# Altium PCB PCB1.PcbDoc (part 7 of 8)
Units mil, origin at the board's own origin, x right, y up, seen from the top; angles counter-clockwise.
Board outline 3820 x 2600 mil, 2 copper layers (Top Layer, Bottom Layer); 88 components, 130 nets, 566 pads, 113 vias.
Unrouted connection lines stored in the file: 16.
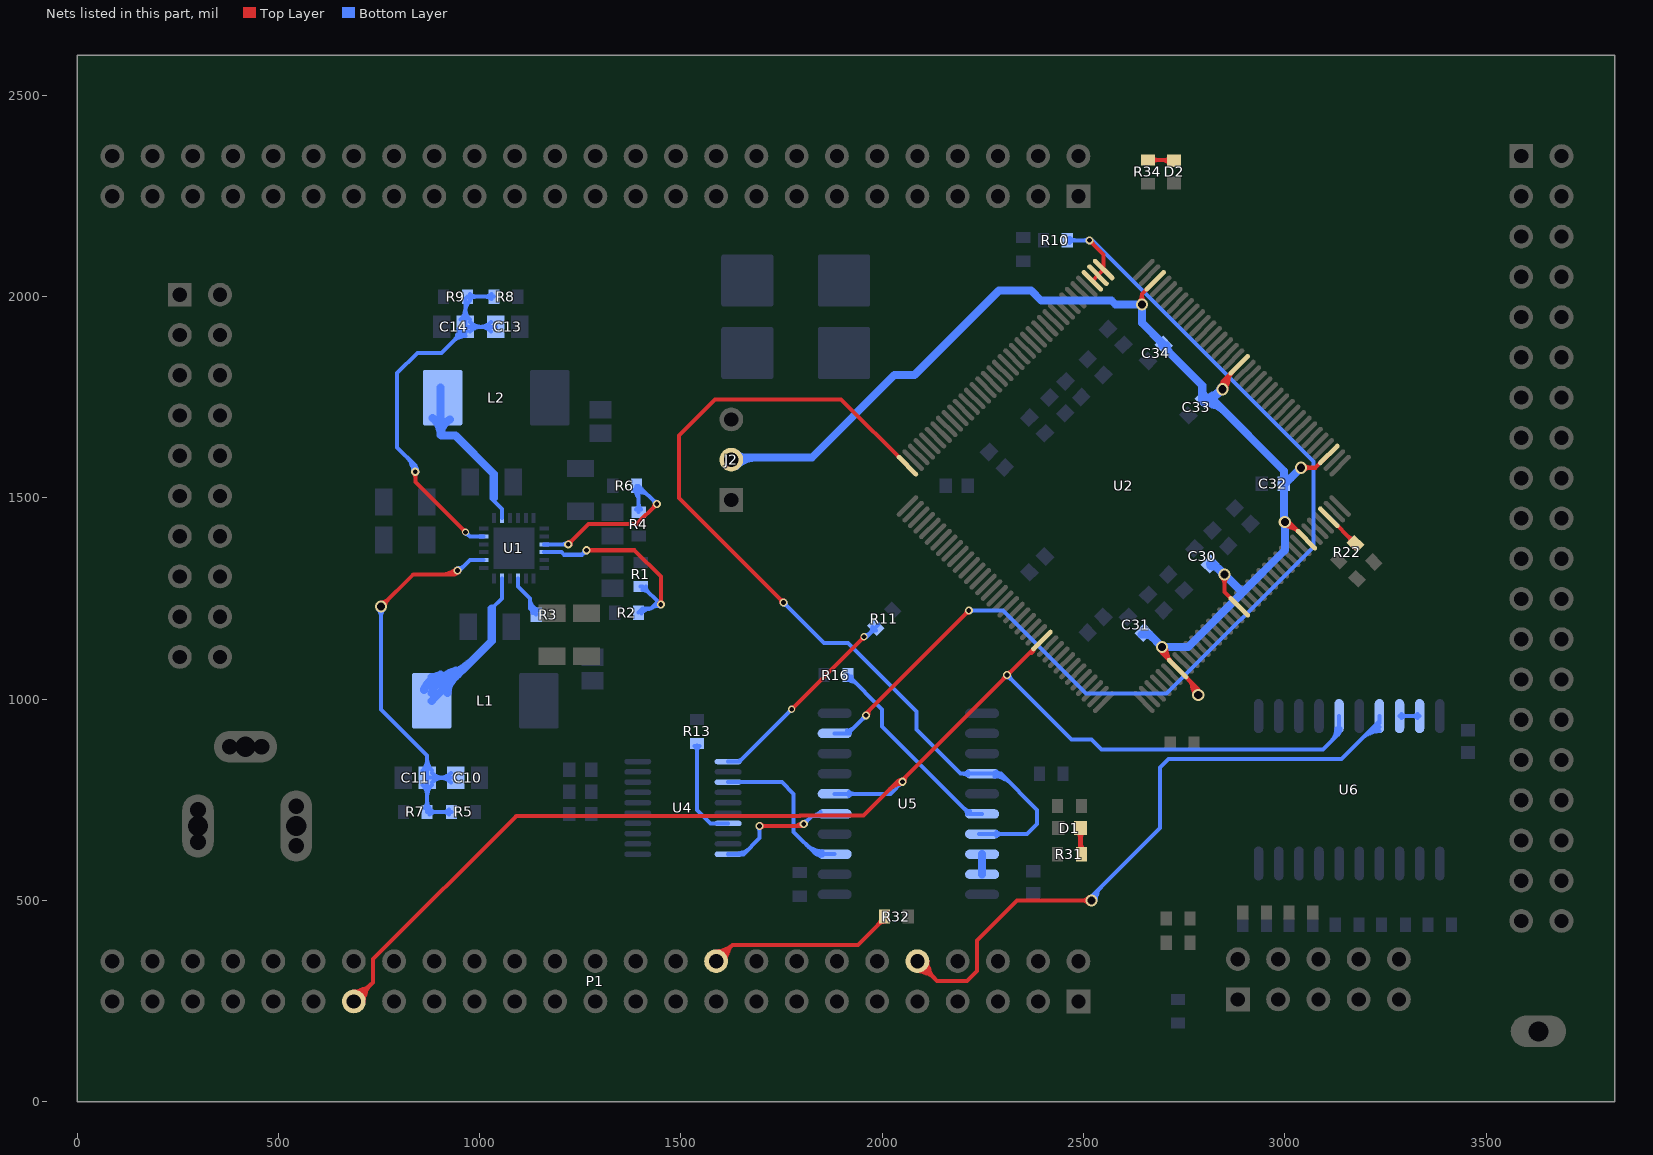
[diagram p7: the nets of this part, all layers, seen from the top]

## Via types
v1: diameter 30, hole 20, Top Layer to Bottom Layer, 74 vias
v2: diameter 20, hole 12, Top Layer to Bottom Layer, 36 vias
v3: diameter 17.72, hole 11.81, Top Layer to Bottom Layer, 3 vias

## Nets (pads, with @x,y where several pads share a name; then routed paths per layer and width w, separated by ;. In a path a pad name is that pad's centre, name@x,y a point inside that pad or via, vN(x,y) a via of type N, cw(c..) or ccw(c..) an arc to the next point about the centre after c; other vN are vias at no path point) (continued)
MSCK: P1.37 U2.97 U5.6 U6.15 | length 4315.3
  Top Layer w10: P1.37@682.04,250.31 cw(c719.7,242.6) 709.75,279.73 ; P1.37@687.4,249.21 735,296.81 735,354.13 1090.87,710 1795.3,710 1796.3,711 1953.37,711 2038.37,796 ; P1.37@688.5,243.85 ccw(c680.79,281.51) 717.92,271.56 ; 2028.33,784.19 ccw(c2020.94,811.78) v2@2045.67,797.5 ; 2370.67,1114.5 ccw(c2360.22,1124.95) U2.97@2374.99,1124.95 ; 2372.91,1116.75 ccw(c2367.11,1122.55) U2.97@2375.02,1124.71 ; 2372.91,1117.41 cw(c2381.25,1117.41) U2.97@2376.42,1124.21 ; 2372.91,1118.03 ccw(c2367.55,1123.39) U2.97@2375.01,1124.78 ; U2.97@2396.78,1145.82 2046.95,796 2038.37,796 ; 712.2,274.01 cw(c687.4,298.81) 687.4,263.74 ccw(c687.4,298.81) 712.2,274.01 ; 712.2,274.01 ccw(c737,249.21) 701.93,249.21 cw(c737,249.21) 712.2,274.01 ; 729.27,291.08 cw(c687.4,332.95) 687.4,273.74 ccw(c687.4,332.95) 729.27,291.08 ; 729.27,291.08 ccw(c771.14,249.21) 711.93,249.21 cw(c771.14,249.21) 729.27,291.08 ; 2038.37,796 cw(c2038.37,786.73) 2045.92,792.1 ccw(c2038.37,786.73) 2038.37,796 ; 2019.91,777.54 cw(c2050,747.44) 2050,790 ccw(c2050,747.44) 2019.91,777.54 ; 2036.98,794.61 cw(c2050,781.59) 2050,800 ccw(c2050,781.59) 2036.98,794.61 ; v2@2055,795 cw(c2076.84,795) 2061.4,810.45 ccw(c2076.84,795) v2@2055,795 ; 2300.79,1049.84 ccw(c2290.63,1060) 2305,1060 cw(c2290.63,1060) 2300.79,1049.84 ; 2303.09,1052.14 cw(c2310,1045.23) 2310,1055 ccw(c2310,1045.23) 2303.09,1052.14 ; v2@2310,1065 ccw(c2310,1079.37) 2320.16,1069.21 cw(c2310,1079.37) v2@2310,1065 ; v2@2315,1060 cw(c2324.77,1060) 2317.86,1066.91 ccw(c2324.77,1060) v2@2315,1060
  Bottom Layer w10: U5.6@1881.93,765 2020,765 v2(2050,795) ; v2@2305,1055 cw(c2305,1030.86) 2322.07,1047.93 cw(c2339.14,1065) v2@2315,1065 ; v2@2315,1055 2470,900 2520,900 2545,875 3095,875 3135,915 ; U6.15@3135,958.07 3135,915 ; U5.6@1917.26,760.18 cw(c1928.89,748.56) 1928.89,765 ; U5.6@1917.26,760.18 cw(c1928.89,748.56) 1928.89,765 ; U5.6@1917.26,760.18 cw(c1928.89,748.56) 1928.89,765 ; U5.6@1917.26,769.82 ccw(c1928.89,781.44) 1928.89,765 ; U5.6@1917.26,769.82 ccw(c1928.89,781.44) 1928.89,765 ; U5.6@1917.26,769.82 ccw(c1928.89,781.44) 1928.89,765 ; 2041.46,786.46 cw(c2050,777.93) 2050,790 ccw(c2050,777.93) 2041.46,786.46 ; 2041.46,786.46 ccw(c2032.93,795) 2045,795 cw(c2032.93,795) 2041.46,786.46 ; 2318.54,1051.46 cw(c2327.07,1060) 2315,1060 ccw(c2327.07,1060) 2318.54,1051.46 ; 2318.54,1051.46 ccw(c2310,1042.93) 2310,1055 cw(c2310,1042.93) 2318.54,1051.46 ; 3114.49,894.49 ccw(c3081.43,927.56) U6.15@3128.19,927.56 ; 3114.49,894.49 ccw(c3081.43,927.56) U6.15@3128.19,927.56 ; 3114.49,894.49 ccw(c3081.43,927.56) U6.15@3128.19,927.56 ; U6.15@3131.29,921.85 cw(c3126.83,915) 3135,915 ; U6.15@3131.29,921.85 cw(c3126.83,915) 3135,915 ; U6.15@3131.29,921.85 cw(c3126.83,915) 3135,915 ; 3131.56,911.56 ccw(c3115.57,927.56) U6.15@3138.19,927.56 ; 3131.56,911.56 ccw(c3115.57,927.56) U6.15@3138.19,927.56 ; 3131.56,911.56 ccw(c3115.57,927.56) U6.15@3138.19,927.56 ; 3135,915 cw(c3143.17,915) U6.15@3138.71,921.85 ; 3135,915 cw(c3143.17,915) U6.15@3138.71,921.85 ; 3135,915 cw(c3143.17,915) U6.15@3138.71,921.85
  other v2: 2310,1060
MTMS: P1.10 U6.17 | length 2723.3
  Top Layer w10: P1.10@2082.04,348.11 ccw(c2119.7,355.83) 2109.75,318.7 ; P1.10@2087.4,349.21 2136.61,300 2210,300 2235,325 2235,400.75 2334.25,500 v1(2520,500) ; P1.10@2088.5,354.57 cw(c2080.79,316.92) 2117.92,326.86 ; 2112.2,324.41 cw(c2137,349.21) 2101.93,349.21 ccw(c2137,349.21) 2112.2,324.41 ; 2112.2,324.41 ccw(c2087.4,299.61) 2087.4,334.68 cw(c2087.4,299.61) 2112.2,324.41 ; 2129.27,307.34 cw(c2171.14,349.21) 2111.93,349.21 ccw(c2171.14,349.21) 2129.27,307.34 ; 2129.27,307.34 ccw(c2087.4,265.47) 2087.4,324.68 cw(c2087.4,265.47) 2129.27,307.34 ; 2495.86,500 cw(c2495.86,475.86) v1@2512.93,492.93 ; 2495.86,500 ccw(c2495.86,524.14) v1@2512.93,507.07 ; 2495.86,500 cw(c2495.86,475.86) v1@2512.93,492.93 ; 2495.86,500 ccw(c2495.86,524.14) v1@2512.93,507.07 ; 2495.86,500 ccw(c2495.86,524.14) v1@2512.93,507.07 ; 2495.86,500 cw(c2495.86,475.86) v1@2512.93,492.93
  Bottom Layer w10: 3214.86,916.72 cw(c3227.44,904.14) U6.17@3232.91,921.08 ; U6.17@3229.19,931.12 cw(c3222.59,935.17) 3222.59,927.42 ; U6.17@3229.32,923.8 ccw(c3222.59,919.36) 3222.59,927.42 ; U6.17@3235,958.07 3235,945.3 3140.7,851 2711,851 2690,830 2690,680 2520,510 v1(2520,500) ; v1(2520,500) cw(c2544.14,500) 2527.07,517.07 ; v1(2520,500) ccw(c2506.6,526.13) 2534.97,518.53 ; v1(2520,500) ccw(c2506.6,526.13) 2534.97,518.53 ; v1(2520,500) cw(c2544.14,500) 2527.07,517.07 ; v1(2520,500) ccw(c2506.6,526.13) 2534.97,518.53 ; v1(2520,500) cw(c2544.14,500) 2527.07,517.07 ; v1@2530,500 cw(c2578.28,500) 2544.14,534.14 ; v1@2530,500 cw(c2578.28,500) 2544.14,534.14 ; v1@2530,500 cw(c2578.28,500) 2544.14,534.14 ; 3193.09,903.39 cw(c3235,861.48) U6.17@3235,920.75 ; 3193.09,903.39 cw(c3235,861.48) U6.17@3235,920.75 ; 3193.09,903.39 cw(c3235,861.48) U6.17@3235,920.75 ; 3205.48,912.84 ccw(c3195.41,950.42) U6.17@3229.1,930.96 ; 3205.48,912.84 ccw(c3195.41,950.42) U6.17@3229.1,930.96 ; 3205.48,912.84 ccw(c3195.41,950.42) U6.17@3229.1,930.96 ; 3210.16,920.46 cw(c3235,895.62) U6.17@3235,930.75 ; 3210.16,920.46 cw(c3235,895.62) U6.17@3235,930.75 ; 3210.16,920.46 cw(c3235,895.62) U6.17@3235,930.75 ; 3222.59,927.42 cw(c3224,922.16) U6.17@3228.88,924.56 ; 3222.59,927.42 cw(c3224,922.16) U6.17@3228.88,924.56 ; 3222.59,927.42 cw(c3224,922.16) U6.17@3228.88,924.56 ; U6.17@3227.23,937.53 cw(c3235,929.76) U6.17@3235,940.75 ; U6.17@3227.23,937.53 cw(c3235,929.76) U6.17@3235,940.75 ; U6.17@3227.23,937.53 cw(c3235,929.76) U6.17@3235,940.75
NetC10_1: C10.1 C11.2 R5.1 R7.2 U1.8 | length 2483.1
  Top Layer w10: 767.6,1243.38 ccw(c772.12,1226.49) v1(755,1230) ; 768.38,1242.6 cw(c751.49,1247.12) v1(755,1230) ; 923.16,1312.97 cw(c935.91,1290.89) v2@943.51,1315.23 ; 936.23,1309.36 ccw(c932.02,1316.64) v2@940.16,1318.75 ; v2(945,1320) 935,1310 835,1310 v1(755,1230) ; 772.07,1247.07 cw(c755,1264.14) 755,1240 ccw(c755,1264.14) 772.07,1247.07 ; 772.07,1247.07 ccw(c789.14,1230) 765,1230 cw(c789.14,1230) 772.07,1247.07 ; 936.46,1311.46 cw(c945,1302.93) v2@945,1315 ; 936.46,1311.46 ccw(c927.93,1320) v2@940,1320 ; 936.46,1311.46 cw(c945,1302.93) v2@945,1315 ; 936.46,1311.46 ccw(c927.93,1320) v2@940,1320 ; 936.46,1311.46 ccw(c927.93,1320) v2@940,1320 ; 936.46,1311.46 cw(c945,1302.93) v2@945,1315 ; 908.79,1310 ccw(c908.79,1356.21) 941.46,1323.54 cw(c908.79,1356.21) 908.79,1310 ; 932.93,1310 ccw(c932.93,1332.07) 948.54,1316.46 cw(c932.93,1332.07) 932.93,1310
  Bottom Layer w10: v1(755,1230) 755,975 869.53,860.47 C11.2@869.53,805 ; R5.1@930.47,720 R7.2@869.53,720 C11.2@869.53,805 ; C10.1@930.47,805 C11.2@869.53,805 ; v2(945,1320) 950,1320 975.47,1345.47 U1.8@1010,1345.47 ; 755,1205.86 cw(c779.14,1205.86) 762.07,1222.93 ccw(c779.14,1205.86) 755,1205.86 ; 755,1205.86 ccw(c730.86,1205.86) 747.93,1222.93 cw(c730.86,1205.86) 755,1205.86 ; C11.2@857.75,787.32 cw(c829.32,758.89) 869.53,758.89 ; C11.2@857.75,787.32 cw(c829.32,758.89) 869.53,758.89 ; C11.2@857.75,787.32 cw(c829.32,758.89) 869.53,758.89 ; C11.2@857.75,822.68 ccw(c829.32,851.11) 869.53,851.11 ; C11.2@857.75,822.68 ccw(c829.32,851.11) 869.53,851.11 ; C11.2@857.75,822.68 ccw(c829.32,851.11) 869.53,851.11 ; R7.2@863.32,730.15 ccw(c848.33,745.13) 869.53,745.13 ; R7.2@863.32,730.15 ccw(c848.33,745.13) 869.53,745.13 ; R7.2@863.32,730.15 ccw(c848.33,745.13) 869.53,745.13 ; 869.53,745.13 ccw(c890.72,745.13) R7.2@875.74,730.15 ; 869.53,745.13 ccw(c890.72,745.13) R7.2@875.74,730.15 ; 869.53,745.13 ccw(c890.72,745.13) R7.2@875.74,730.15 ; 869.53,758.89 cw(c909.73,758.89) C11.2@881.3,787.32 ; 869.53,758.89 cw(c909.73,758.89) C11.2@881.3,787.32 ; 869.53,758.89 cw(c909.73,758.89) C11.2@881.3,787.32 ; 869.53,851.11 ccw(c909.73,851.11) C11.2@881.3,822.68 ; 869.53,851.11 ccw(c909.73,851.11) C11.2@881.3,822.68 ; 869.53,851.11 ccw(c909.73,851.11) C11.2@881.3,822.68 ; R7.2@875.74,713.79 cw(c890.72,698.8) 890.72,720 ; R7.2@875.74,713.79 cw(c890.72,698.8) 890.72,720 ; R7.2@875.74,713.79 cw(c890.72,698.8) 890.72,720 ; R7.2@875.74,726.21 ccw(c890.72,741.2) 890.72,720 ; R7.2@875.74,726.21 ccw(c890.72,741.2) 890.72,720 ; R7.2@875.74,726.21 ccw(c890.72,741.2) 890.72,720 ; C11.2@881.3,793.22 cw(c909.73,764.79) 909.73,805 ; C11.2@881.3,793.22 cw(c909.73,764.79) 909.73,805 ; C11.2@881.3,793.22 cw(c909.73,764.79) 909.73,805 ; C11.2@881.3,816.78 ccw(c909.73,845.2) 909.73,805 ; C11.2@881.3,816.78 ccw(c909.73,845.2) 909.73,805 ; C11.2@881.3,816.78 ccw(c909.73,845.2) 909.73,805 ; 900.27,805 cw(c900.27,764.79) C10.1@928.7,793.22 ; 900.27,805 ccw(c900.27,845.2) C10.1@928.7,816.78 ; 900.27,805 cw(c900.27,764.79) C10.1@928.7,793.22 ; 900.27,805 ccw(c900.27,845.2) C10.1@928.7,816.78 ; 900.27,805 ccw(c900.27,845.2) C10.1@928.7,816.78 ; 900.27,805 cw(c900.27,764.79) C10.1@928.7,793.22 ; 909.28,720 cw(c909.28,698.8) R5.1@924.26,713.79 ; 909.28,720 ccw(c909.28,741.2) R5.1@924.26,726.21 ; 909.28,720 cw(c909.28,698.8) R5.1@924.26,713.79 ; 909.28,720 ccw(c909.28,741.2) R5.1@924.26,726.21 ; 909.28,720 ccw(c909.28,741.2) R5.1@924.26,726.21 ; 909.28,720 cw(c909.28,698.8) R5.1@924.26,713.79 ; v2@945,1325 ccw(c945,1349.14) 962.07,1332.07 ; v2@945,1325 ccw(c945,1349.14) 962.07,1332.07 ; v2@945,1325 ccw(c945,1349.14) 962.07,1332.07
NetC13_1: C13.1 C14.2 R8.1 R9.2 U1.11 | length 2631.2
  Top Layer w10: v2(840,1565) 840,1540 v3(965,1415) ; v2@836.46,1561.46 cw(c827.93,1552.93) 840,1552.93 ; v2@836.46,1561.46 cw(c827.93,1552.93) 840,1552.93 ; v2@836.46,1561.46 cw(c827.93,1552.93) 840,1552.93 ; 840,1552.93 cw(c852.07,1552.93) v2@843.54,1561.46 ; 840,1552.93 cw(c852.07,1552.93) v2@843.54,1561.46 ; 840,1552.93 cw(c852.07,1552.93) v2@843.54,1561.46 ; 958.41,1421.59 cw(c951.83,1415) v3@961.14,1415 ; 958.41,1421.59 ccw(c965,1428.17) v3@965,1418.86 ; 958.41,1421.59 cw(c951.83,1415) v3@961.14,1415 ; 958.41,1421.59 ccw(c965,1428.17) v3@965,1418.86 ; 958.41,1421.59 ccw(c965,1428.17) v3@965,1418.86 ; 958.41,1421.59 cw(c951.83,1415) v3@961.14,1415
  Bottom Layer w10: 832.05,1579.78 cw(c822.81,1570.55) v2@835.24,1566.54 ; v2(840,1565) 840,1580 795,1625 795,1810 845,1860 905.24,1860 964.53,1919.29 C14.2@964.53,1925 ; v3(965,1415) 975.47,1404.53 U1.11@1010,1404.53 ; R8.1@1035.47,2000 R9.2@969.53,2000 964.53,1995 C14.2@964.53,1925 ; C13.1@1040.47,1925 C14.2@964.53,1925 ; 820.86,1599.14 cw(c786.72,1565) v2@835,1565 ; 820.86,1599.14 cw(c786.72,1565) v2@835,1565 ; 820.86,1599.14 cw(c786.72,1565) v2@835,1565 ; 829.19,1586.67 ccw(c856.78,1594.06) v2@842.5,1569.33 ; 829.19,1586.67 ccw(c856.78,1594.06) v2@842.5,1569.33 ; 829.19,1586.67 ccw(c856.78,1594.06) v2@842.5,1569.33 ; v2@836.46,1568.54 ccw(c827.93,1577.07) 840,1577.07 ; v2@836.46,1568.54 ccw(c827.93,1577.07) 840,1577.07 ; v2@836.46,1568.54 ccw(c827.93,1577.07) 840,1577.07 ; 837.93,1582.07 cw(c820.86,1565) v2@845,1565 ; 837.93,1582.07 cw(c820.86,1565) v2@845,1565 ; 837.93,1582.07 cw(c820.86,1565) v2@845,1565 ; 840,1577.07 ccw(c852.07,1577.07) v2@843.54,1568.54 ; 840,1577.07 ccw(c852.07,1577.07) v2@843.54,1568.54 ; 840,1577.07 ccw(c852.07,1577.07) v2@843.54,1568.54 ; 935.77,1890.53 cw(c964.53,1861.77) C14.2@964.53,1902.44 ; 935.77,1890.53 cw(c964.53,1861.77) C14.2@964.53,1902.44 ; 935.77,1890.53 cw(c964.53,1861.77) C14.2@964.53,1902.44 ; 936.23,1890.99 ccw(c908.13,1919.09) C14.2@947.87,1919.09 ; 936.23,1890.99 ccw(c908.13,1919.09) C14.2@947.87,1919.09 ; 936.23,1890.99 ccw(c908.13,1919.09) C14.2@947.87,1919.09 ; C14.2@943.68,1903.43 cw(c969.03,1896.64) C14.2@963.87,1922.38 ; C14.2@943.68,1903.43 cw(c969.03,1896.64) C14.2@963.87,1922.38 ; C14.2@943.68,1903.43 cw(c969.03,1896.64) C14.2@963.87,1922.38 ; C14.2@948.69,1898.2 ccw(c941.82,1923.84) C14.2@967.8,1918.41 ; C14.2@948.69,1898.2 ccw(c941.82,1923.84) C14.2@967.8,1918.41 ; C14.2@948.69,1898.2 ccw(c941.82,1923.84) C14.2@967.8,1918.41 ; C14.2@952.75,1942.68 ccw(c924.32,1971.11) 964.53,1971.11 ; C14.2@952.75,1942.68 ccw(c924.32,1971.11) 964.53,1971.11 ; C14.2@952.75,1942.68 ccw(c924.32,1971.11) 964.53,1971.11 ; 964.53,1962.8 cw(c1002.79,1962.8) R9.2@975.74,1989.85 ; 964.53,1962.8 cw(c1002.79,1962.8) R9.2@975.74,1989.85 ; 964.53,1962.8 cw(c1002.79,1962.8) R9.2@975.74,1989.85 ; 964.53,1971.11 ccw(c1004.73,1971.11) C14.2@976.3,1942.68 ; 964.53,1971.11 ccw(c1004.73,1971.11) C14.2@976.3,1942.68 ; 964.53,1971.11 ccw(c1004.73,1971.11) C14.2@976.3,1942.68 ; v3@965,1411.14 cw(c965,1401.83) 971.59,1408.41 ; v3@965,1411.14 cw(c965,1401.83) 971.59,1408.41 ; v3@965,1411.14 cw(c965,1401.83) 971.59,1408.41 ; v3@968.86,1415 ccw(c978.17,1415) 971.59,1408.41 ; v3@968.86,1415 ccw(c978.17,1415) 971.59,1408.41 ; v3@968.86,1415 ccw(c978.17,1415) 971.59,1408.41 ; R9.2@975.74,1993.79 cw(c990.72,1978.8) 990.72,2000 ; R9.2@975.74,1993.79 cw(c990.72,1978.8) 990.72,2000 ; R9.2@975.74,1993.79 cw(c990.72,1978.8) 990.72,2000 ; R9.2@975.74,2006.21 ccw(c990.72,2021.2) 990.72,2000 ; R9.2@975.74,2006.21 ccw(c990.72,2021.2) 990.72,2000 ; R9.2@975.74,2006.21 ccw(c990.72,2021.2) 990.72,2000 ; C14.2@976.3,1913.22 cw(c1004.73,1884.79) 1004.73,1925 ; C14.2@976.3,1913.22 cw(c1004.73,1884.79) 1004.73,1925 ; C14.2@976.3,1913.22 cw(c1004.73,1884.79) 1004.73,1925 ; C14.2@976.3,1936.78 ccw(c1004.73,1965.2) 1004.73,1925 ; C14.2@976.3,1936.78 ccw(c1004.73,1965.2) 1004.73,1925 ; C14.2@976.3,1936.78 ccw(c1004.73,1965.2) 1004.73,1925 ; 1000.27,1925 cw(c1000.27,1884.79) C13.1@1028.7,1913.22 ; 1000.27,1925 ccw(c1000.27,1965.2) C13.1@1028.7,1936.78 ; 1000.27,1925 cw(c1000.27,1884.79) C13.1@1028.7,1913.22 ; 1000.27,1925 ccw(c1000.27,1965.2) C13.1@1028.7,1936.78 ; 1000.27,1925 ccw(c1000.27,1965.2) C13.1@1028.7,1936.78 ; 1000.27,1925 cw(c1000.27,1884.79) C13.1@1028.7,1913.22 ; 1014.28,2000 cw(c1014.28,1978.8) R8.1@1029.26,1993.79 ; 1014.28,2000 ccw(c1014.28,2021.2) R8.1@1029.26,2006.21 ; 1014.28,2000 cw(c1014.28,1978.8) R8.1@1029.26,1993.79 ; 1014.28,2000 ccw(c1014.28,2021.2) R8.1@1029.26,2006.21 ; 1014.28,2000 ccw(c1014.28,2021.2) R8.1@1029.26,2006.21 ; 1014.28,2000 cw(c1014.28,1978.8) R8.1@1029.26,1993.79
NetD1_2: D1.2 R31.2 | length 255.2
  Top Layer w12: D1.2@2492.56,680 2492.56,626.97 R31.2@2494.53,625 ; D1.2@2485.67,671.14 cw(c2469.03,654.5) 2492.56,654.5 ; D1.2@2485.67,671.14 cw(c2469.03,654.5) 2492.56,654.5 ; D1.2@2485.67,671.14 cw(c2469.03,654.5) 2492.56,654.5 ; R31.2@2489.03,624.44 ccw(c2480.5,632.96) 2492.56,632.96 ; R31.2@2489.03,624.44 ccw(c2480.5,632.96) 2492.56,632.96 ; R31.2@2489.03,624.44 ccw(c2480.5,632.96) 2492.56,632.96 ; 2492.56,642.47 ccw(c2518.06,642.47) R31.2@2500.03,624.44 ; 2492.56,642.47 ccw(c2518.06,642.47) R31.2@2500.03,624.44 ; 2492.56,642.47 ccw(c2518.06,642.47) R31.2@2500.03,624.44 ; 2492.56,654.5 cw(c2516.09,654.5) D1.2@2499.45,671.14 ; 2492.56,654.5 cw(c2516.09,654.5) D1.2@2499.45,671.14 ; 2492.56,654.5 cw(c2516.09,654.5) D1.2@2499.45,671.14
NetD2_2: D2.2 R34.1 | length 288
  Top Layer w10: R34.1@2660,2339.53 2723.03,2339.53 D2.2@2725,2337.56 ; R34.1@2670.15,2333.32 cw(c2685.13,2318.33) 2685.13,2339.53 ; R34.1@2670.15,2333.32 cw(c2685.13,2318.33) 2685.13,2339.53 ; R34.1@2670.15,2333.32 cw(c2685.13,2318.33) 2685.13,2339.53 ; R34.1@2670.15,2345.74 ccw(c2685.13,2360.72) 2685.13,2339.53 ; R34.1@2670.15,2345.74 ccw(c2685.13,2360.72) 2685.13,2339.53 ; R34.1@2670.15,2345.74 ccw(c2685.13,2360.72) 2685.13,2339.53 ; 2692.33,2339.53 cw(c2692.33,2306.86) D2.2@2715.43,2329.96 ; 2692.33,2339.53 cw(c2692.33,2306.86) D2.2@2715.43,2329.96 ; 2692.33,2339.53 cw(c2692.33,2306.86) D2.2@2715.43,2329.96 ; 2701.84,2339.53 ccw(c2701.84,2358.75) D2.2@2715.43,2345.16 ; 2701.84,2339.53 ccw(c2701.84,2358.75) D2.2@2715.43,2345.16 ; 2701.84,2339.53 ccw(c2701.84,2358.75) D2.2@2715.43,2345.16
NetL1_2: L1.2 U1.5 | length 1473.5
  Bottom Layer w10: 1030,1225 1055.47,1250.47 U1.5@1055.47,1300
  Bottom Layer w20: L1.2@881,996 1030,1145 1030,1225 ; L1.2@861.52,1022.93 cw(c919.07,1001.53) L1.2@903.18,1060.84 ; L1.2@861.52,1022.93 cw(c919.07,1001.53) L1.2@903.18,1060.84 ; L1.2@861.52,1022.93 cw(c919.07,1001.53) L1.2@903.18,1060.84 ; L1.2@880.26,1015.96 cw(c963.62,984.96) 940.6,1070.87 ; L1.2@880.26,1015.96 cw(c963.62,984.96) 940.6,1070.87 ; L1.2@880.26,1015.96 cw(c963.62,984.96) 940.6,1070.87 ; L1.2@881,1034.9 ccw(c881,1128.8) 947.4,1062.4 ; L1.2@881,1034.9 ccw(c881,1128.8) 947.4,1062.4 ; L1.2@881,1034.9 ccw(c881,1128.8) 947.4,1062.4 ; L1.2@881,1054.9 ccw(c881,1197.09) 981.54,1096.54 ; L1.2@881,1054.9 ccw(c881,1197.09) 981.54,1096.54 ; L1.2@881,1054.9 ccw(c881,1197.09) 981.54,1096.54 ; L1.2@920.21,1015.68 cw(c967.36,1015.68) 934.02,1049.02 ; L1.2@920.21,1015.68 cw(c967.36,1015.68) 934.02,1049.02 ; L1.2@920.21,1015.68 cw(c967.36,1015.68) 934.02,1049.02
NetL2_1: L2.1 U1.14 | length 691.1
  Bottom Layer w10: 1035,1500 1035,1492.63 1055.47,1472.16 U1.14@1055.47,1450
  Bottom Layer w20: L2.1@903,1774 903,1657 905,1655 939.6,1655 1035,1559.6 1035,1500 ; L2.1@883.08,1699.04 cw(c848.32,1656.83) 903,1656.83 ; L2.1@883.08,1699.04 cw(c848.32,1656.83) 903,1656.83 ; L2.1@883.08,1699.04 cw(c848.32,1656.83) 903,1656.83 ; 903,1656.83 cw(c945.31,1656.83) L2.1@925.95,1694.45 ; 903,1656.83 cw(c945.31,1656.83) L2.1@925.95,1694.45 ; 903,1656.83 cw(c945.31,1656.83) L2.1@925.95,1694.45
NetP1_20: P1.20 R32.2 | length 896.7
  Top Layer w10: P1.20@1582.1,350.58 cw(c1620.81,340.57) 1611.37,379.42 ; P1.20@1587.4,349.21 1627.93,389.74 ; P1.20@1588.77,343.91 ccw(c1578.76,382.62) 1617.61,373.18 ; R32.2@2005.47,455.47 1939.74,389.74 1627.93,389.74 ; 1611.4,373.21 cw(c1588.5,396.12) 1587.74,363.74 ccw(c1588.5,396.12) 1611.4,373.21 ; 1611.4,373.21 ccw(c1634.31,350.31) 1601.92,349.55 cw(c1634.31,350.31) 1611.4,373.21 ; 1627.93,389.74 cw(c1589.25,428.41) 1587.97,373.73 ccw(c1589.25,428.41) 1627.93,389.74 ; 1627.93,389.74 ccw(c1666.6,351.06) 1611.92,349.79 cw(c1666.6,351.06) 1627.93,389.74 ; 1990.07,440.07 ccw(c1974.07,456.06) 1996.69,456.06 cw(c1974.07,456.06) 1990.07,440.07 ; 1991.49,441.49 cw(c2005.47,427.51) 2005.47,447.28 ccw(c2005.47,427.51) 1991.49,441.49
NetR1_1: R1.1 R2.2 U1.22 | length 1166.7
  Top Layer w10: v2(1265,1370) 1385,1370 1450,1305 v2(1450,1235) ; v2@1268.54,1366.46 cw(c1277.07,1357.93) 1277.07,1370 ; v2@1268.54,1366.46 cw(c1277.07,1357.93) 1277.07,1370 ; v2@1268.54,1366.46 cw(c1277.07,1357.93) 1277.07,1370 ; v2@1268.54,1373.54 ccw(c1277.07,1382.07) 1277.07,1370 ; v2@1268.54,1373.54 ccw(c1277.07,1382.07) 1277.07,1370 ; v2@1268.54,1373.54 ccw(c1277.07,1382.07) 1277.07,1370 ; v2@1446.46,1238.54 ccw(c1437.93,1247.07) 1450,1247.07 ; v2@1446.46,1238.54 ccw(c1437.93,1247.07) 1450,1247.07 ; v2@1446.46,1238.54 ccw(c1437.93,1247.07) 1450,1247.07 ; 1450,1247.07 ccw(c1462.07,1247.07) v2@1453.54,1238.54 ; 1450,1247.07 ccw(c1462.07,1247.07) v2@1453.54,1238.54 ; 1450,1247.07 ccw(c1462.07,1247.07) v2@1453.54,1238.54
  Bottom Layer w10: U1.22@1160,1365.16 1202.76,1365.16 1209.07,1358.84 1253.84,1358.84 v2(1265,1370) ; R2.2@1394.53,1215 1404.53,1225 1425,1225 ; R1.1@1400,1280.47 1404.53,1280.47 v2(1450,1235) 1435,1235 1425,1225 ; 1256.46,1361.46 cw(c1265,1352.93) v2@1265,1365 ; 1256.46,1361.46 ccw(c1247.93,1370) v2@1260,1370 ; 1256.46,1361.46 cw(c1265,1352.93) v2@1265,1365 ; 1256.46,1361.46 ccw(c1247.93,1370) v2@1260,1370 ; 1256.46,1361.46 ccw(c1247.93,1370) v2@1260,1370 ; 1256.46,1361.46 cw(c1265,1352.93) v2@1265,1365 ; R2.2@1401.44,1213.52 cw(c1425,1195.08) 1425,1225 ; R2.2@1401.44,1213.52 cw(c1425,1195.08) 1425,1225 ; R2.2@1401.44,1213.52 cw(c1425,1195.08) 1425,1225 ; R1.1@1403.94,1271.69 cw(c1403.94,1249.07) 1419.93,1265.07 ; R1.1@1403.94,1271.69 cw(c1403.94,1249.07) 1419.93,1265.07 ; R1.1@1403.94,1271.69 cw(c1403.94,1249.07) 1419.93,1265.07 ; R1.1@1412.72,1280.47 ccw(c1432.49,1280.47) 1418.51,1266.49 ; R1.1@1412.72,1280.47 ccw(c1432.49,1280.47) 1418.51,1266.49 ; R1.1@1412.72,1280.47 ccw(c1432.49,1280.47) 1418.51,1266.49 ; 1425,1225 cw(c1440.86,1209.14) v2@1448.33,1230.29 ; 1425,1225 cw(c1440.86,1209.14) v2@1448.33,1230.29 ; 1425,1225 cw(c1440.86,1209.14) v2@1448.33,1230.29 ; 1431.9,1231.57 ccw(c1433.15,1247.51) v2@1445.99,1237.98 ; 1431.9,1231.57 ccw(c1433.15,1247.51) v2@1445.99,1237.98 ; 1431.9,1231.57 ccw(c1433.15,1247.51) v2@1445.99,1237.98 ; 1436.21,1236.21 cw(c1446.72,1225.71) v2@1451.67,1239.71 ; 1436.21,1236.21 cw(c1446.72,1225.71) v2@1451.67,1239.71 ; 1436.21,1236.21 cw(c1446.72,1225.71) v2@1451.67,1239.71 ; 1437.93,1235 cw(c1437.93,1222.93) v2@1446.46,1231.46 ; 1437.93,1235 ccw(c1437.93,1247.07) v2@1446.46,1238.54 ; 1437.93,1235 cw(c1437.93,1222.93) v2@1446.46,1231.46 ; 1437.93,1235 ccw(c1437.93,1247.07) v2@1446.46,1238.54 ; 1437.93,1235 ccw(c1437.93,1247.07) v2@1446.46,1238.54 ; 1437.93,1235 cw(c1437.93,1222.93) v2@1446.46,1231.46 ; 1441.46,1243.54 cw(c1432.93,1235) v2@1445,1235 ; 1441.46,1243.54 ccw(c1450,1252.07) v2@1450,1240 ; 1441.46,1243.54 cw(c1432.93,1235) v2@1445,1235 ; 1441.46,1243.54 ccw(c1450,1252.07) v2@1450,1240 ; 1441.46,1243.54 ccw(c1450,1252.07) v2@1450,1240 ; 1441.46,1243.54 cw(c1432.93,1235) v2@1445,1235
NetR3_1: R3.1 U1.3 | length 420.6
  Bottom Layer w10: U1.3@1094.84,1300 1094.84,1280.16 1125,1250 ; R3.1@1140.47,1210 1125,1225.47 ; 1125,1225.47 ccw(c1134.03,1234.5) R3.1@1137.85,1222.32 ; 1125,1225.47 ccw(c1134.03,1234.5) R3.1@1137.85,1222.32 ; 1125,1225.47 ccw(c1134.03,1234.5) R3.1@1137.85,1222.32 ; 1125,1225.47 1125,1250 ; 1125,1235.13 ccw(c1149.1,1235.13) R3.1@1140.01,1212.81 ; 1125,1235.13 ccw(c1149.1,1235.13) R3.1@1140.01,1212.81 ; 1125,1235.13 ccw(c1149.1,1235.13) R3.1@1140.01,1212.81 ; 1125,1250 ccw(c1155.16,1250) R3.1@1143.78,1222.07 ; 1125,1250 ccw(c1155.16,1250) R3.1@1143.78,1222.07 ; 1125,1250 ccw(c1155.16,1250) R3.1@1143.78,1222.07 ; R3.1@1128.27,1222.2 cw(c1120,1213.94) R3.1@1131.69,1213.94 ; R3.1@1128.27,1222.2 cw(c1120,1213.94) R3.1@1131.69,1213.94 ; R3.1@1128.27,1222.2 cw(c1120,1213.94) R3.1@1131.69,1213.94 ; 1129.44,1232.93 cw(c1122.35,1223.57) R3.1@1132.72,1218.06 ; 1129.44,1232.93 cw(c1122.35,1223.57) R3.1@1132.72,1218.06 ; 1129.44,1232.93 cw(c1122.35,1223.57) R3.1@1132.72,1218.06
NetR4_1: R4.1 R6.2 U1.21 | length 1123.6
  Top Layer w10: v2(1220,1384.84) 1270.16,1435 1390,1435 v2(1440,1485) ; v2@1220,1389.84 ccw(c1220,1401.91) 1228.54,1393.38 ; v2@1220,1389.84 ccw(c1220,1401.91) 1228.54,1393.38 ; v2@1220,1389.84 ccw(c1220,1401.91) 1228.54,1393.38 ; v2@1225,1384.84 cw(c1237.07,1384.84) 1228.54,1393.38 ; v2@1225,1384.84 cw(c1237.07,1384.84) 1228.54,1393.38 ; v2@1225,1384.84 cw(c1237.07,1384.84) 1228.54,1393.38 ; 1431.46,1476.46 cw(c1440,1467.93) v2@1440,1480 ; 1431.46,1476.46 ccw(c1422.93,1485) v2@1435,1485 ; 1431.46,1476.46 cw(c1440,1467.93) v2@1440,1480 ; 1431.46,1476.46 ccw(c1422.93,1485) v2@1435,1485 ; 1431.46,1476.46 ccw(c1422.93,1485) v2@1435,1485 ; 1431.46,1476.46 cw(c1440,1467.93) v2@1440,1480
  Bottom Layer w10: U1.21@1160,1384.84 v2(1220,1384.84) ; R6.2@1389.53,1530 1395,1530 v2(1440,1485) ; R4.1@1395,1464.53 R6.2@1395,1524.53 ; 1207.93,1384.84 cw(c1207.93,1372.77) v2@1216.46,1381.31 ; 1207.93,1384.84 ccw(c1207.93,1396.91) v2@1216.46,1388.38 ; 1207.93,1384.84 cw(c1207.93,1372.77) v2@1216.46,1381.31 ; 1207.93,1384.84 ccw(c1207.93,1396.91) v2@1216.46,1388.38 ; 1207.93,1384.84 ccw(c1207.93,1396.91) v2@1216.46,1388.38 ; 1207.93,1384.84 cw(c1207.93,1372.77) v2@1216.46,1381.31 ; R6.2@1383.32,1519.85 cw(c1355.12,1491.66) 1395,1491.66 ; R6.2@1383.32,1519.85 cw(c1355.12,1491.66) 1395,1491.66 ; R6.2@1383.32,1519.85 cw(c1355.12,1491.66) 1395,1491.66 ; R6.2@1388.45,1525.49 ccw(c1409.68,1536.78) 1403.46,1513.55 ; R6.2@1388.45,1525.49 ccw(c1409.68,1536.78) 1403.46,1513.55 ; R6.2@1388.45,1525.49 ccw(c1409.68,1536.78) 1403.46,1513.55 ; R4.1@1388.79,1470.74 ccw(c1373.8,1485.72) 1395,1485.72 ; R4.1@1388.79,1470.74 ccw(c1373.8,1485.72) 1395,1485.72 ; R4.1@1388.79,1470.74 ccw(c1373.8,1485.72) 1395,1485.72 ; R6.2@1389.53,1517.28 cw(c1389.53,1473.37) 1420.58,1504.42 ; R6.2@1389.53,1517.28 cw(c1389.53,1473.37) 1420.58,1504.42 ; R6.2@1389.53,1517.28 cw(c1389.53,1473.37) 1420.58,1504.42 ; R6.2@1389.53,1527.28 cw(c1389.53,1507.51) 1403.51,1521.49 ; R6.2@1389.53,1527.28 cw(c1389.53,1507.51) 1403.51,1521.49 ; R6.2@1389.53,1527.28 cw(c1389.53,1507.51) 1403.51,1521.49 ; 1391.19,1506.22 cw(c1399.21,1510.85) R6.2@1394.24,1518.66 ; 1391.19,1506.22 cw(c1399.21,1510.85) R6.2@1394.24,1518.66 ; 1391.19,1506.22 cw(c1399.21,1510.85) R6.2@1394.24,1518.66 ; 1395,1485.72 ccw(c1416.2,1485.72) R4.1@1401.21,1470.74 ; 1395,1485.72 ccw(c1416.2,1485.72) R4.1@1401.21,1470.74 ; 1395,1485.72 ccw(c1416.2,1485.72) R4.1@1401.21,1470.74 ; 1431.46,1493.54 cw(c1422.93,1485) v2@1435,1485 ; 1431.46,1493.54 ccw(c1440,1502.07) v2@1440,1490 ; 1431.46,1493.54 cw(c1422.93,1485) v2@1435,1485 ; 1431.46,1493.54 ccw(c1440,1502.07) v2@1440,1490 ; 1431.46,1493.54 ccw(c1440,1502.07) v2@1440,1490 ; 1431.46,1493.54 cw(c1422.93,1485) v2@1435,1485
NetR10_1: R10.1 U2.37 U2.38 U2.39 U5.9 | length 3320.2
  Top Layer w10: v2(1960,960) 1960,965 v2(2215,1220) ; v2(2515,2140) 2549.89,2105.11 U2.37@2549.89,2067.29 U2.38@2535.97,2053.37 U2.39@2522.05,2039.45 ; v2@1965,960 cw(c1989.14,960) 1972.07,977.07 ; v2@1965,960 cw(c1989.14,960) 1972.07,977.07 ; v2@1965,960 cw(c1989.14,960) 1972.07,977.07 ; 2206.46,1211.46 cw(c2215,1202.93) v2@2215,1215 ; 2206.46,1211.46 ccw(c2197.93,1220) v2@2210,1220 ; 2206.46,1211.46 cw(c2215,1202.93) v2@2215,1215 ; 2206.46,1211.46 ccw(c2197.93,1220) v2@2210,1220 ; 2206.46,1211.46 ccw(c2197.93,1220) v2@2210,1220 ; 2206.46,1211.46 cw(c2215,1202.93) v2@2215,1215 ; v2@2515,2135 cw(c2515,2122.93) 2523.54,2131.46 ; v2@2515,2135 cw(c2515,2122.93) 2523.54,2131.46 ; v2@2515,2135 cw(c2515,2122.93) 2523.54,2131.46 ; v2@2520,2140 ccw(c2532.07,2140) 2523.54,2131.46 ; v2@2520,2140 ccw(c2532.07,2140) 2523.54,2131.46 ; v2@2520,2140 ccw(c2532.07,2140) 2523.54,2131.46
  Bottom Layer w10: U5.9@1881.93,915 1915,915 v2(1960,960) ; v2(2215,1220) 2300,1220 2506,1014 2706.63,1014 3071,1378.37 3071,1590.77 2521.77,2140 v2(2515,2140) 2464.53,2140 R10.1@2459.53,2145 ; U5.9@1912.44,921.81 ccw(c1912.44,944.43) 1928.44,928.44 ; U5.9@1912.44,921.81 ccw(c1912.44,944.43) 1928.44,928.44 ; U5.9@1912.44,921.81 ccw(c1912.44,944.43) 1928.44,928.44 ; U5.9@1919.25,915 cw(c1929.52,915) 1922.26,922.26 ; U5.9@1919.25,915 cw(c1929.52,915) 1922.26,922.26 ; U5.9@1919.25,915 cw(c1929.52,915) 1922.26,922.26 ; 1951.46,951.46 cw(c1960,942.93) v2@1960,955 ; 1951.46,951.46 ccw(c1942.93,960) v2@1955,960 ; 1951.46,951.46 cw(c1960,942.93) v2@1960,955 ; 1951.46,951.46 ccw(c1942.93,960) v2@1955,960 ; 1951.46,951.46 ccw(c1942.93,960) v2@1955,960 ; 1951.46,951.46 cw(c1960,942.93) v2@1960,955 ; v2@2218.54,1216.46 cw(c2227.07,1207.93) 2227.07,1220 ; v2@2218.54,1216.46 cw(c2227.07,1207.93) 2227.07,1220 ; v2@2218.54,1216.46 cw(c2227.07,1207.93) 2227.07,1220 ; v2@2218.54,1223.54 ccw(c2227.07,1232.07) 2227.07,1220 ; v2@2218.54,1223.54 ccw(c2227.07,1232.07) 2227.07,1220 ; v2@2218.54,1223.54 ccw(c2227.07,1232.07) 2227.07,1220 ; R10.1@2465.74,2133.79 cw(c2480.72,2118.8) 2480.72,2140 ; R10.1@2465.74,2133.79 cw(c2480.72,2118.8) 2480.72,2140 ; R10.1@2465.74,2133.79 cw(c2480.72,2118.8) 2480.72,2140 ; R10.1@2465.74,2146.21 ccw(c2480.72,2161.2) 2480.72,2140 ; R10.1@2465.74,2146.21 ccw(c2480.72,2161.2) 2480.72,2140 ; R10.1@2465.74,2146.21 ccw(c2480.72,2161.2) 2480.72,2140 ; 2502.93,2140 cw(c2502.93,2127.93) v2@2511.46,2136.46 ; 2502.93,2140 ccw(c2502.93,2152.07) v2@2511.46,2143.54 ; 2502.93,2140 cw(c2502.93,2127.93) v2@2511.46,2136.46 ; 2502.93,2140 ccw(c2502.93,2152.07) v2@2511.46,2143.54 ; 2502.93,2140 ccw(c2502.93,2152.07) v2@2511.46,2143.54 ; 2502.93,2140 cw(c2502.93,2127.93) v2@2511.46,2136.46 ; v2@2515,2135 cw(c2515,2106.59) 2535.09,2126.68 ; v2@2515,2135 cw(c2515,2106.59) 2535.09,2126.68 ; v2@2515,2135 cw(c2515,2106.59) 2535.09,2126.68
NetR11_1: R11.1 U4.1 | length 781.8
  Top Layer w10: v3(1775,975) v3(1955,1155) ; 1781.59,981.59 cw(c1775,988.17) 1775,978.86 ccw(c1775,988.17) 1781.59,981.59 ; 1781.59,981.59 ccw(c1788.17,975) 1778.86,975 cw(c1788.17,975) 1781.59,981.59 ; 1948.41,1148.41 cw(c1955,1141.83) v3@1955,1151.14 ; 1948.41,1148.41 ccw(c1941.83,1155) v3@1951.14,1155 ; 1948.41,1148.41 cw(c1955,1141.83) v3@1955,1151.14 ; 1948.41,1148.41 ccw(c1941.83,1155) v3@1951.14,1155 ; 1948.41,1148.41 ccw(c1941.83,1155) v3@1951.14,1155 ; 1948.41,1148.41 cw(c1955,1141.83) v3@1955,1151.14
  Bottom Layer w10: U4.1@1617.2,845.16 1645.16,845.16 v3(1775,975) ; v3(1955,1155) 1960.47,1155 R11.1@1990.47,1185 ; 1768.41,968.41 cw(c1775,961.83) 1775,971.14 ccw(c1775,961.83) 1768.41,968.41 ; 1768.41,968.41 ccw(c1761.83,975) 1771.14,975 cw(c1761.83,975) 1768.41,968.41 ; v3@1955,1158.86 ccw(c1955,1181.38) 1970.93,1165.46 ; v3@1955,1158.86 ccw(c1955,1181.38) 1970.93,1165.46 ; v3@1955,1158.86 ccw(c1955,1181.38) 1970.93,1165.46 ; 1968.8,1163.33 ccw(c1953.01,1179.12) R11.1@1975.34,1179.12 ; 1968.8,1163.33 ccw(c1953.01,1179.12) R11.1@1975.34,1179.12 ; 1968.8,1163.33 ccw(c1953.01,1179.12) R11.1@1975.34,1179.12 ; 1969.94,1164.47 cw(c1984.12,1150.28) R11.1@1984.12,1170.34 ; 1969.94,1164.47 cw(c1984.12,1150.28) R11.1@1984.12,1170.34 ; 1969.94,1164.47 cw(c1984.12,1150.28) R11.1@1984.12,1170.34 ; U4.1@1643.78,847.05 ccw(c1643.78,854.94) 1649.36,849.36 cw(c1643.78,854.94) U4.1@1643.78,847.05
NetR13_1: R13.1 U4.7 | length 351.4
  Bottom Layer w10: R13.1@1540,885.47 1540,725 1573.39,691.61 U4.7@1617.2,691.61 ; R13.1@1533.79,884.26 cw(c1518.8,869.28) 1540,869.28 ; R13.1@1533.79,884.26 cw(c1518.8,869.28) 1540,869.28 ; R13.1@1533.79,884.26 cw(c1518.8,869.28) 1540,869.28 ; 1540,869.28 cw(c1561.2,869.28) R13.1@1546.21,884.26 ; 1540,869.28 cw(c1561.2,869.28) R13.1@1546.21,884.26 ; 1540,869.28 cw(c1561.2,869.28) R13.1@1546.21,884.26
NetR16_2: R16.2 U5.16 | length 731.2
  Bottom Layer w10: R16.2@1915,1060 2000,975 2000,932.33 2217.33,715 U5.16@2248.07,715 ; R16.2@1913.38,1055.64 ccw(c1930.7,1062.08) R16.2@1925.92,1044.23 ; R16.2@1913.38,1055.64 ccw(c1930.7,1062.08) R16.2@1925.92,1044.23 ; R16.2@1913.38,1055.64 ccw(c1930.7,1062.08) R16.2@1925.92,1044.23 ; R16.2@1914.53,1047.28 cw(c1914.53,1015.44) 1937.04,1037.96 ; R16.2@1914.53,1047.28 cw(c1914.53,1015.44) 1937.04,1037.96 ; R16.2@1914.53,1047.28 cw(c1914.53,1015.44) 1937.04,1037.96 ; R16.2@1923.31,1056.06 ccw(c1933.86,1056.06) R16.2@1926.4,1048.6 ; R16.2@1923.31,1056.06 ccw(c1933.86,1056.06) R16.2@1926.4,1048.6 ; R16.2@1923.31,1056.06 ccw(c1933.86,1056.06) R16.2@1926.4,1048.6 ; 2205.54,726.79 ccw(c2217.56,738.81) U5.16@2217.56,721.81 ; 2205.54,726.79 ccw(c2217.56,738.81) U5.16@2217.56,721.81 ; 2205.54,726.79 ccw(c2217.56,738.81) U5.16@2217.56,721.81 ; 2206.09,726.24 cw(c2194.86,715) U5.16@2210.75,715 ; 2206.09,726.24 cw(c2194.86,715) U5.16@2210.75,715 ; 2206.09,726.24 cw(c2194.86,715) U5.16@2210.75,715
NetR22_2: R22.2 U2.142 | length 299.1
  Top Layer w10: U2.142@3109.45,1452.05 3175.62,1385.88 R22.2@3185.88,1385.88 ; 3157.67,1403.83 ccw(c3173.1,1419.25) R22.2@3173.1,1397.44 ; 3157.67,1403.83 ccw(c3173.1,1419.25) R22.2@3173.1,1397.44 ; 3157.67,1403.83 ccw(c3173.1,1419.25) R22.2@3173.1,1397.44 ; 3158.29,1403.22 cw(c3143.74,1388.66) R22.2@3164.32,1388.66 ; 3158.29,1403.22 cw(c3143.74,1388.66) R22.2@3164.32,1388.66 ; 3158.29,1403.22 cw(c3143.74,1388.66) R22.2@3164.32,1388.66 ; 3161.9,1397.69 ccw(c3175.56,1401.35) R22.2@3172.86,1387.47 ; 3161.9,1397.69 ccw(c3175.56,1401.35) R22.2@3172.86,1387.47 ; 3161.9,1397.69 ccw(c3175.56,1401.35) R22.2@3172.86,1387.47 ; 3163.81,1399.93 cw(c3160.04,1385.85) R22.2@3174.29,1388.92 ; 3163.81,1399.93 cw(c3160.04,1385.85) R22.2@3174.29,1388.92 ; 3163.81,1399.93 cw(c3160.04,1385.85) R22.2@3174.29,1388.92
NetU5_18: U5.18 U5.19 | length 50
  Bottom Layer w20: U5.19@2248.07,565 U5.18@2248.07,615
NetU6_18: U6.18 U6.19 | length 205
  Bottom Layer w10: U6.18@3285,958.07 U6.19@3335,958.07 ; U6.18@3289.82,953.25 cw(c3301.44,941.63) 3301.44,958.07 ; U6.18@3289.82,953.25 cw(c3301.44,941.63) 3301.44,958.07 ; U6.18@3289.82,953.25 cw(c3301.44,941.63) 3301.44,958.07 ; U6.18@3289.82,962.89 ccw(c3301.44,974.51) 3301.44,958.07 ; U6.18@3289.82,962.89 ccw(c3301.44,974.51) 3301.44,958.07 ; U6.18@3289.82,962.89 ccw(c3301.44,974.51) 3301.44,958.07 ; 3318.56,958.07 cw(c3318.56,941.63) U6.19@3330.18,953.25 ; 3318.56,958.07 ccw(c3318.56,974.51) U6.19@3330.18,962.89 ; 3318.56,958.07 cw(c3318.56,941.63) U6.19@3330.18,953.25 ; 3318.56,958.07 ccw(c3318.56,974.51) U6.19@3330.18,962.89 ; 3318.56,958.07 ccw(c3318.56,974.51) U6.19@3330.18,962.89 ; 3318.56,958.07 cw(c3318.56,941.63) U6.19@3330.18,953.25
PCCLK: U4.3 U5.3 | length 790.4
  Bottom Layer w10: U4.3@1617.2,793.98 1751.02,793.98 1780,765 1780,670 1835,615 ; 1831.28,625.83 ccw(c1843.86,638.42) U5.3@1849.33,621.48 ; U5.3@1881.93,615 1835,615 ; 1811.76,638.24 ccw(c1851.42,677.89) U5.3@1851.42,621.81 ; 1811.76,638.24 ccw(c1851.42,677.89) U5.3@1851.42,621.81 ; 1811.76,638.24 ccw(c1851.42,677.89) U5.3@1851.42,621.81 ; 1821.9,629.72 cw(c1811.83,592.14) U5.3@1845.52,611.59 ; 1821.9,629.72 cw(c1811.83,592.14) U5.3@1845.52,611.59 ; 1821.9,629.72 cw(c1811.83,592.14) U5.3@1845.52,611.59 ; 1828.83,621.17 ccw(c1851.42,643.75) U5.3@1851.42,611.81 ; 1828.83,621.17 ccw(c1851.42,643.75) U5.3@1851.42,611.81 ; 1828.83,621.17 ccw(c1851.42,643.75) U5.3@1851.42,611.81 ; 1835,615 cw(c1835,598.62) U5.3@1846.6,610.19 ; 1835,615 ccw(c1835,631.38) U5.3@1846.6,619.81 ; 1835,615 cw(c1835,598.62) U5.3@1846.6,610.19 ; 1835,615 ccw(c1835,631.38) U5.3@1846.6,619.81 ; 1835,615 ccw(c1835,631.38) U5.3@1846.6,619.81 ; 1835,615 cw(c1835,598.62) U5.3@1846.6,610.19
PDONE: U4.10 U5.5 | length 708.7
  Top Layer w10: v2(1695,685) 1800,685 v2(1805,690) ; 1790.82,687.39 cw(c1795.47,679.33) v2@1801.67,686.27 ; 1707.07,685 cw(c1707.07,697.07) 1698.54,688.54 ccw(c1707.07,697.07) 1707.07,685 ; 1707.07,685 ccw(c1707.07,672.93) 1698.54,681.46 cw(c1707.07,672.93) 1707.07,685 ; 1780.86,685 ccw(c1780.86,714.14) 1801.46,693.54 cw(c1780.86,714.14) 1780.86,685
  Bottom Layer w10: U4.10@1617.2,614.84 1654.84,614.84 1695,655 v2(1695,685) ; U4.10@1645.42,613.9 cw(c1654.76,608.5) 1651.97,618.93 ; v2(1805,690) 1825,710 ; U5.5@1916.93,710 1825,710 ; 1695,672.93 cw(c1707.07,672.93) 1698.54,681.46 ccw(c1707.07,672.93) 1695,672.93 ; 1695,672.93 ccw(c1682.93,672.93) 1691.46,681.46 cw(c1682.93,672.93) 1695,672.93 ; v2@1805,695 ccw(c1805,707.07) 1813.54,698.54 ; v2@1805,695 ccw(c1805,707.07) 1813.54,698.54 ; v2@1805,695 ccw(c1805,707.07) 1813.54,698.54 ; v2@1810,690 cw(c1822.07,690) 1813.54,698.54 ; v2@1810,690 cw(c1822.07,690) 1813.54,698.54 ; v2@1810,690 cw(c1822.07,690) 1813.54,698.54 ; 1825,710 ccw(c1825,738.64) U5.5@1846.34,719.54 ; 1825,710 ccw(c1825,738.64) U5.5@1846.34,719.54 ; 1825,710 ccw(c1825,738.64) U5.5@1846.34,719.54 ; 1836.35,713.01 cw(c1840.12,707.23) U5.5@1845.81,711.14 ; 1836.35,713.01 cw(c1840.12,707.23) U5.5@1845.81,711.14 ; 1836.35,713.01 cw(c1840.12,707.23) U5.5@1845.81,711.14 ; U4.10@1643.78,616.73 ccw(c1643.78,648) 1665.89,625.89 cw(c1643.78,648) U4.10@1643.78,616.73
VCCO_LT: C30.2 C31.2 C32.2 C33.2 C34.2 J2.2 U2.3 U2.19 U2.34 U2.115 U2.126 U2.138 | length 6468.8
  Top Layer w10: v1(2645,1980) 2645,2006.5 U2.34@2677.95,2039.45 ; v1@2695,1125 2695,1114.85 ; v1@2775.37,1012.71 ccw(c2766.16,1015.3) 2772.93,1022.07 ccw(c2779.7,1028.84) v1@2782.29,1019.63 ; v1@2847.71,1779.63 ccw(c2850.3,1788.84) 2857.07,1782.07 ccw(c2863.84,1775.3) v1@2854.63,1772.71 ; v1(2850,1310) 2850,1266.08 U2.126@2886.74,1229.34 ; U2.19@2886.74,1830.66 2845,1788.92 ; v1@3003.2,1430.52 cw(c3005.34,1424.16) 3010.31,1428.68 cw(c3015.27,1433.2) v1@3009.14,1435.93 ; v1(3040,1575) 3076.5,1575 U2.3@3109.45,1607.95 ; U2.138@3053.77,1396.37 3010.15,1440 v1(3000,1440) ; v1@2637.93,1987.07 ccw(c2620.86,2004.14) 2645,2004.14 ; v1@2637.93,1987.07 ccw(c2620.86,2004.14) 2645,2004.14 ; v1@2637.93,1987.07 ccw(c2620.86,2004.14) 2645,2004.14 ; 2645,2004.14 ccw(c2669.14,2004.14) v1@2652.07,1987.07 ; 2645,2004.14 ccw(c2669.14,2004.14) v1@2652.07,1987.07 ; 2645,2004.14 ccw(c2669.14,2004.14) v1@2652.07,1987.07 ; v1@2691.07,1120.8 cw(c2688.53,1114.85) 2695,1114.85 ; v1@2691.07,1120.8 cw(c2688.53,1114.85) 2695,1114.85 ; v1@2691.07,1120.8 cw(c2688.53,1114.85) 2695,1114.85 ; v1@2691.69,1120.56 cw(c2687.42,1108.37) 2699.9,1111.72 ; v1@2691.69,1120.56 cw(c2687.42,1108.37) 2699.9,1111.72 ; v1@2691.69,1120.56 cw(c2687.42,1108.37) 2699.9,1111.72 ; 2695,1114.85 cw(c2701.47,1114.85) v1@2698.93,1120.8 ; 2695,1114.85 cw(c2701.47,1114.85) v1@2698.93,1120.8 ; 2695,1114.85 cw(c2701.47,1114.85) v1@2698.93,1120.8 ; 2695,1114.85 U2.115@2733.63,1076.23 2785,1024.85 v1(2785,1010) ; v1(2695,1130) ccw(c2731.57,1130) 2705.71,1104.14 ; v1(2695,1130) ccw(c2731.57,1130) 2705.71,1104.14 ; v1(2695,1130) ccw(c2731.57,1130) 2705.71,1104.14 ; 2699.9,1111.72 cw(c2712.38,1115.06) v1@2702.58,1123.48 ; 2699.9,1111.72 cw(c2712.38,1115.06) v1@2702.58,1123.48 ; 2699.9,1111.72 cw(c2712.38,1115.06) v1@2702.58,1123.48 ; v1@2705,1130 ccw(c2765.71,1130) U2.115@2722.78,1087.07 ; v1@2705,1130 ccw(c2765.71,1130) U2.115@2722.78,1087.07 ; v1@2705,1130 ccw(c2765.71,1130) U2.115@2722.78,1087.07 ; U2.115@2757.43,1052.43 cw(c2715,1010) v1@2775,1010 ; U2.115@2757.43,1052.43 cw(c2715,1010) v1@2775,1010 ; U2.115@2757.43,1052.43 cw(c2715,1010) v1@2775,1010 ; 2769.63,1030.02 ccw(c2801.49,1038.56) v1(2785,1010) ; 2769.63,1030.02 ccw(c2801.49,1038.56) v1(2785,1010) ; 2769.63,1030.02 ccw(c2801.49,1038.56) v1(2785,1010) ; 2774.5,1035.35 cw(c2749.14,1010) v1(2785,1010) ; 2774.5,1035.35 cw(c2749.14,1010) v1(2785,1010) ; 2774.5,1035.35 cw(c2749.14,1010) v1(2785,1010) ; v1@2777.53,1016.64 ccw(c2768.39,1024.76) 2780.2,1027.93 ; v1@2777.53,1016.64 ccw(c2768.39,1024.76) 2780.2,1027.93 ; v1@2777.53,1016.64 ccw(c2768.39,1024.76) 2780.2,1027.93 ; 2780.2,1027.93 ccw(c2792,1031.09) v1@2788.15,1019.49 ; 2780.2,1027.93 ccw(c2792,1031.09) v1@2788.15,1019.49 ; 2780.2,1027.93 ccw(c2792,1031.09) v1@2788.15,1019.49 ; v1@2839.37,1778.26 ccw(c2832.1,1788.92) 2845,1788.92 ; v1@2839.37,1778.26 ccw(c2832.1,1788.92) 2845,1788.92 ; v1@2839.37,1778.26 ccw(c2832.1,1788.92) 2845,1788.92 ; v1@2840.13,1778.73 ccw(c2828.95,1798.78) 2851.12,1792.84 ; v1@2840.13,1778.73 ccw(c2828.95,1798.78) 2851.12,1792.84 ; v1@2840.13,1778.73 ccw(c2828.95,1798.78) 2851.12,1792.84 ; v1@2842.93,1302.93 cw(c2825.86,1285.86) 2850,1285.86 ; v1@2842.93,1302.93 cw(c2825.86,1285.86) 2850,1285.86 ; v1@2842.93,1302.93 cw(c2825.86,1285.86) 2850,1285.86 ; v1(2845,1770) ccw(c2828.51,1798.56) 2860.37,1790.02 ; v1(2845,1770) cw(c2890.68,1770) 2858.38,1802.3 ; v1(2845,1770) ccw(c2828.51,1798.56) 2860.37,1790.02 ; v1(2845,1770) cw(c2890.68,1770) 2858.38,1802.3 ; v1(2845,1770) ccw(c2828.51,1798.56) 2860.37,1790.02 ; v1(2845,1770) cw(c2890.68,1770) 2858.38,1802.3 ; v1(2845,1770) 2845,1788.92 ; 2845,1788.92 ccw(c2857.9,1788.92) v1@2850.63,1778.26 ; 2845,1788.92 ccw(c2857.9,1788.92) v1@2850.63,1778.26 ; 2845,1788.92 ccw(c2857.9,1788.92) v1@2850.63,1778.26 ; 2850,1285.86 cw(c2874.14,1285.86) v1@2857.07,1302.93 ; 2850,1285.86 cw(c2874.14,1285.86) v1@2857.07,1302.93 ; 2850,1285.86 cw(c2874.14,1285.86) v1@2857.07,1302.93 ; 2851.12,1792.84 ccw(c2873.29,1786.9) v1@2853.58,1775.13 ; 2851.12,1792.84 ccw(c2873.29,1786.9) v1@2853.58,1775.13 ; 2851.12,1792.84 ccw(c2873.29,1786.9) v1@2853.58,1775.13 ; v1@2855,1770 cw(c2924.82,1770) U2.19@2875.45,1819.37 ; v1@2855,1770 cw(c2924.82,1770) U2.19@2875.45,1819.37 ; v1@2855,1770 cw(c2924.82,1770) U2.19@2875.45,1819.37 ; v1@3000,1430 cw(c3000,1381.36) U2.138@3034.4,1415.75 ; v1@3000,1430 cw(c3000,1381.36) U2.138@3034.4,1415.75 ; v1@3000,1430 cw(c3000,1381.36) U2.138@3034.4,1415.75 ; v1(3000,1440) ccw(c3026.27,1453.57) 3018.62,1425.01 ; v1(3000,1440) ccw(c3026.27,1453.57) 3018.62,1425.01 ; v1(3000,1440) cw(c3000,1415.5) 3017.32,1432.82 ; v1(3000,1440) ccw(c3026.27,1453.57) 3018.62,1425.01 ; v1(3000,1440) cw(c3000,1415.5) 3017.32,1432.82 ; v1(3000,1440) cw(c3000,1415.5) 3017.32,1432.82 ; v1@3047.07,1567.93 cw(c3064.14,1550.86) 3064.14,1575 ; v1@3047.07,1567.93 cw(c3064.14,1550.86) 3064.14,1575 ; v1@3047.07,1567.93 cw(c3064.14,1550.86) 3064.14,1575 ; v1@3047.07,1582.07 ccw(c3064.14,1599.14) 3064.14,1575 ; v1@3047.07,1582.07 ccw(c3064.14,1599.14) 3064.14,1575 ; v1@3047.07,1582.07 ccw(c3064.14,1599.14) 3064.14,1575
  Bottom Layer w20: J2.2@1610,1600 1825,1600 2030,1805 2080,1805 2290,2015 2370,2015 2395,1990 2570,1990 2580,1980 v1(2645,1980) 2645,1935 C34.2@2697.5,1882.5 ; C31.2@2644.49,1160.51 2664.49,1160.51 v1(2695,1130) 2760,1130 2895,1265 ; C34.2@2694.49,1879.49 2795,1778.97 C33.2@2795,1740 ; C30.2@2814.49,1335.51 2820,1330 2820,1340 v1(2850,1310) 2895,1265 ; v1(2845,1770) 2815,1740 C33.2@2795,1740 ; v1(3040,1575) 3000,1535 C32.2@2997.56,1535 ; J2.2@1638.81,1581.19 cw(c1684.21,1535.79) 1684.21,1600 ; J2.2@1638.81,1581.19 cw(c1684.21,1535.79) 1684.21,1600 ; J2.2@1638.81,1581.19 cw(c1684.21,1535.79) 1684.21,1600 ; J2.2@1638.81,1608.81 ccw(c1660.07,1630.07) 1660.07,1600 ; J2.2@1638.81,1608.81 ccw(c1660.07,1630.07) 1660.07,1600 ; J2.2@1638.81,1608.81 ccw(c1660.07,1630.07) 1660.07,1600 ; C31.2@2650.88,1161.16 cw(c2650.88,1129.86) 2673.01,1151.99 ; C31.2@2650.88,1161.16 cw(c2650.88,1129.86) 2673.01,1151.99 ; C31.2@2650.88,1161.16 cw(c2650.88,1129.86) 2673.01,1151.99 ; C34.2@2706.63,1878.1 ccw(c2732.58,1878.1) 2714.23,1859.75 ; C34.2@2706.63,1878.1 ccw(c2732.58,1878.1) 2714.23,1859.75 ; C34.2@2706.63,1878.1 ccw(c2732.58,1878.1) 2714.23,1859.75 ; C33.2@2795,1740 2825,1740 2997.56,1567.44 C32.2@2997.56,1535 ; 2795,1767.23 ccw(c2819.44,1767.23) C33.2@2802.16,1749.94 ; 2795,1767.23 ccw(c2819.44,1767.23) C33.2@2802.16,1749.94 ; 2795,1767.23 ccw(c2819.44,1767.23) C33.2@2802.16,1749.94 ; C33.2@2800.88,1737.35 cw(c2800.88,1672.71) 2846.58,1718.42 ; C33.2@2800.88,1737.35 cw(c2800.88,1672.71) 2846.58,1718.42 ; C33.2@2800.88,1737.35 cw(c2800.88,1672.71) 2846.58,1718.42 ; C33.2@2800.88,1748.84 ccw(c2800.88,1804.28) v1@2840.08,1765.08 ; C33.2@2800.88,1748.84 ccw(c2800.88,1804.28) v1@2840.08,1765.08 ; C33.2@2800.88,1748.84 ccw(c2800.88,1804.28) v1@2840.08,1765.08 ; C33.2@2804.94,1747.16 ccw(c2822.23,1764.44) 2822.23,1740 ; C33.2@2804.94,1747.16 ccw(c2822.23,1764.44) 2822.23,1740 ; C33.2@2804.94,1747.16 ccw(c2822.23,1764.44) 2822.23,1740 ; C33.2@2805.86,1740.22 cw(c2834.29,1723.8) 2825.79,1755.52 ; C33.2@2805.86,1740.22 cw(c2834.29,1723.8) 2825.79,1755.52 ; C33.2@2805.86,1740.22 cw(c2834.29,1723.8) 2825.79,1755.52 ; C33.2@2805.86,1745.97 ccw(c2834.29,1762.39) 2825.79,1730.67 ; C33.2@2805.86,1745.97 ccw(c2834.29,1762.39) 2825.79,1730.67 ; C33.2@2805.86,1745.97 ccw(c2834.29,1762.39) 2825.79,1730.67 ; C30.2@2815.88,1331.16 cw(c2815.88,1299.86) 2838.01,1321.99 ; C30.2@2815.88,1331.16 cw(c2815.88,1299.86) 2838.01,1321.99 ; C30.2@2815.88,1331.16 cw(c2815.88,1299.86) 2838.01,1321.99 ; 2831.68,1760.23 ccw(c2822.57,1776.01) v1@2840.17,1771.29 ; 2831.68,1760.23 ccw(c2822.57,1776.01) v1@2840.17,1771.29 ; 2831.68,1760.23 ccw(c2822.57,1776.01) v1@2840.17,1771.29 ; 2831.68,1760.23 ccw(c2822.57,1776.01) v1@2840.17,1771.29 ; 2831.68,1760.23 ccw(c2822.57,1776.01) v1@2840.17,1771.29 ; 2831.68,1760.23 ccw(c2822.57,1776.01) v1@2840.17,1771.29 ; 2832.57,1325.13 cw(c2819.04,1301.7) v1@2845.17,1308.71 ; 2832.57,1325.13 cw(c2819.04,1301.7) v1@2845.17,1308.71 ; 2832.57,1325.13 cw(c2819.04,1301.7) v1@2845.17,1308.71 ; 2832.57,1325.13 cw(c2819.04,1301.7) v1@2845.17,1308.71 ; 2832.57,1325.13 cw(c2819.04,1301.7) v1@2845.17,1308.71 ; 2832.57,1325.13 cw(c2819.04,1301.7) v1@2845.17,1308.71 ; 2895,1265 3000,1370 v1(3000,1440) 2997.56,1442.44 C32.2@2997.56,1535 ; 2997.56,1457.96 ccw(c3017.96,1457.96) v1@3003.54,1443.54 ; 2997.56,1457.96 ccw(c3017.96,1457.96) v1@3003.54,1443.54 ; 2997.56,1457.96 ccw(c3017.96,1457.96) v1@3003.54,1443.54 ; C32.2@2997.56,1542.72 ccw(c2997.56,1567.24) 3014.9,1549.9 ; C32.2@2997.56,1542.72 ccw(c2997.56,1567.24) 3014.9,1549.9 ; C32.2@2997.56,1542.72 ccw(c2997.56,1567.24) 3014.9,1549.9
XCCLK: U2.72 U5.14 U5.17 | length 2920.6
  Top Layer w10: v2(1755,1240) 1495,1500 1495,1655 1585,1745 1897.82,1745 U2.72@2062.71,1580.11 ; 1746.46,1248.54 cw(c1737.93,1240) v2@1750,1240 ; 1746.46,1248.54 ccw(c1755,1257.07) v2@1755,1245 ; 1746.46,1248.54 cw(c1737.93,1240) v2@1750,1240 ; 1746.46,1248.54 ccw(c1755,1257.07) v2@1755,1245 ; 1746.46,1248.54 ccw(c1755,1257.07) v2@1755,1245 ; 1746.46,1248.54 cw(c1737.93,1240) v2@1750,1240
  Bottom Layer w10: v2(1755,1240) 1855,1140 1915,1140 2085,970 2085,925 2195,815 U5.14@2248.07,815 2295,815 ; U5.17@2240,665 2360,665 2385,690 2385,725 2295,815 ; U5.14@2280.67,808.52 cw(c2286.14,791.58) 2298.72,804.17 ; v2@1755,1235 cw(c1755,1222.93) 1763.54,1231.46 ; v2@1755,1235 cw(c1755,1222.93) 1763.54,1231.46 ; v2@1755,1235 cw(c1755,1222.93) 1763.54,1231.46 ; v2@1760,1240 ccw(c1772.07,1240) 1763.54,1231.46 ; v2@1760,1240 ccw(c1772.07,1240) 1763.54,1231.46 ; v2@1760,1240 ccw(c1772.07,1240) 1763.54,1231.46 ; 2201.11,815 cw(c2201.11,798.56) U5.14@2212.74,810.18 ; 2201.11,815 ccw(c2201.11,831.44) U5.14@2212.74,819.82 ; 2201.11,815 cw(c2201.11,798.56) U5.14@2212.74,810.18 ; 2201.11,815 ccw(c2201.11,831.44) U5.14@2212.74,819.82 ; 2201.11,815 ccw(c2201.11,831.44) U5.14@2212.74,819.82 ; 2201.11,815 cw(c2201.11,798.56) U5.14@2212.74,810.18 ; U5.14@2278.58,808.19 cw(c2278.58,752.11) 2318.24,791.76 ; U5.14@2278.58,808.19 cw(c2278.58,752.11) 2318.24,791.76 ; U5.14@2278.58,808.19 cw(c2278.58,752.11) 2318.24,791.76 ; U5.14@2278.58,818.19 cw(c2278.58,786.25) 2301.17,808.83 ; U5.14@2278.58,818.19 cw(c2278.58,786.25) 2301.17,808.83 ; U5.14@2278.58,818.19 cw(c2278.58,786.25) 2301.17,808.83 ; U5.17@2283.4,660.18 cw(c2295.03,648.56) 2295.03,665 ; U5.17@2283.4,660.18 cw(c2295.03,648.56) 2295.03,665 ; U5.17@2283.4,660.18 cw(c2295.03,648.56) 2295.03,665 ; U5.17@2283.4,669.82 ccw(c2295.03,681.44) 2295.03,665 ; U5.17@2283.4,669.82 ccw(c2295.03,681.44) 2295.03,665 ; U5.17@2283.4,669.82 ccw(c2295.03,681.44) 2295.03,665 ; U5.14@2283.4,810.19 cw(c2295,798.62) 2295,815 ; U5.14@2283.4,810.19 cw(c2295,798.62) 2295,815 ; U5.14@2283.4,810.19 cw(c2295,798.62) 2295,815 ; U5.14@2283.4,819.81 ccw(c2295,831.38) 2295,815 ; U5.14@2283.4,819.81 ccw(c2295,831.38) 2295,815 ; U5.14@2283.4,819.81 ccw(c2295,831.38) 2295,815 ; U5.14@2284.48,818.41 ccw(c2318.17,837.86) 2308.1,800.28 ; U5.14@2284.48,818.41 ccw(c2318.17,837.86) 2308.1,800.28 ; U5.14@2284.48,818.41 ccw(c2318.17,837.86) 2308.1,800.28